# EAGLE board aw_301_runner (EAGLE 6.4)
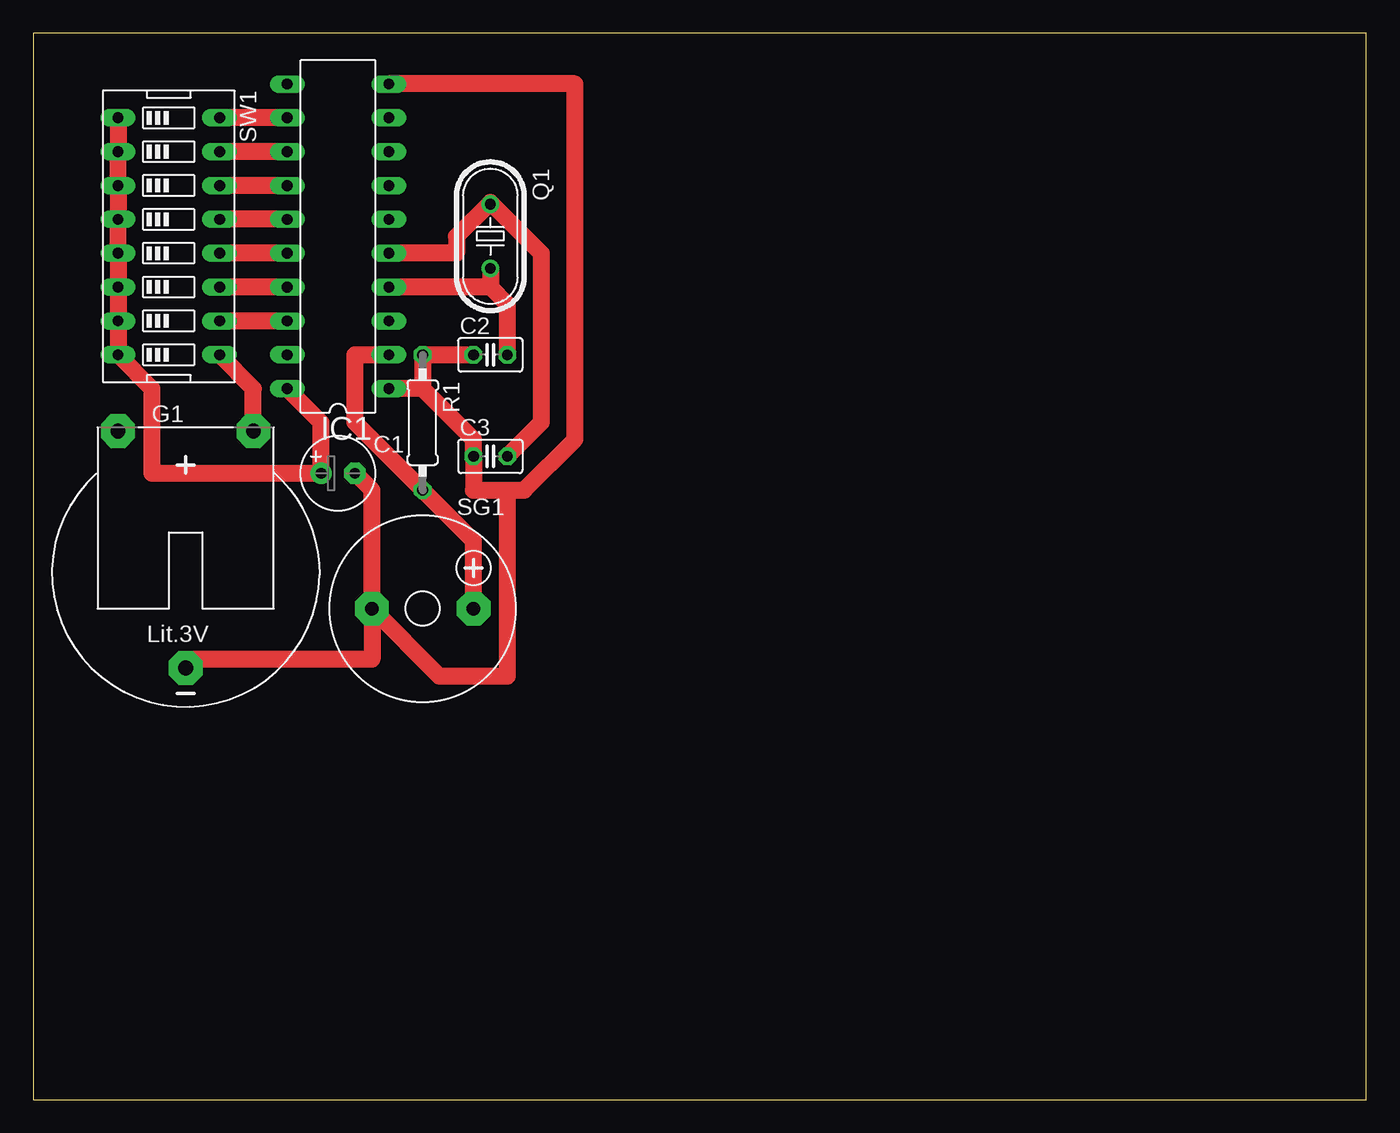
[diagram p0: board, top side]

Size 100 x 80 mm. Coordinates in mm from the lower left corner, seen from the top.
Outline: 0,0 100,0 100,80 0,80 0,0
Copper layers (1*16): Top 0.035mm / dielectric 1.5mm / Bottom 0.035mm
Design rules "default": minimum track width 10mil, minimum drill 24mil, track to track 8mil, track to pad 8mil, pad to pad 8mil, via to via 8mil, smd to smd 8mil, copper to edge 40mil, drill to drill 8mil, minimum pad ring 10mil, minimum via ring 8mil, stop-mask expansion 4mil, vias tented up to drill 0mil, thermal gap 10mil
Net classes: 0 default: width 1.27 mm, clearance 0.508 mm

## Footprints (pad centres in the part's own frame; a part is rotated, then mirrored left to right if it is on the bottom)
E2,5-6 = drill 0.813 pad 1.6: + -1.27,0 | drill 0.813 pad 1.6 octagon: - 1.27,0
C025-025X050 = drill 0.813 octagon: 1 -1.27,0; 2 1.27,0
CR2032H = drill 1.118 pad 2.54 octagon: + 5.08,10.795; +@1 -5.08,10.795; - 0,-6.985
DIL20 = drill 0.813 long: 1 -11.43,-3.81; 2 -8.89,-3.81; 3 -6.35,-3.81; 4 -3.81,-3.81; 5 -1.27,-3.81; 6 1.27,-3.81; 7 3.81,-3.81; 8 6.35,-3.81; 9 8.89,-3.81; 10 11.43,-3.81; 11 11.43,3.81; 12 8.89,3.81; 13 6.35,3.81; 14 3.81,3.81; 15 1.27,3.81; 16 -1.27,3.81; 17 -3.81,3.81; 18 -6.35,3.81; 19 -8.89,3.81; 20 -11.43,3.81
HC49U70 = drill 0.813: 1 -2.413,0; 2 2.413,0
0207/10 = drill 0.813 octagon: 1 -5.08,0; 2 5.08,0
F/CM12P = drill 1.016 pad 2.54 octagon: + 3.81,0; - -3.81,0
EDG-08 = drill 0.813 long: 1 -8.89,-3.81; 2 -6.35,-3.81; 3 -3.81,-3.81; 4 -1.27,-3.81; 5 1.27,-3.81; 6 3.81,-3.81; 7 6.35,-3.81; 8 8.89,-3.81; 9 8.89,3.81; 10 6.35,3.81; 11 3.81,3.81; 12 1.27,3.81; 13 -1.27,3.81; 14 -3.81,3.81; 15 -6.35,3.81; 16 -8.89,3.81

## Placement (x,y rotation side)
C1  100mF  [E2,5-6]  22.86,46.99 0 top
C2  22pF  [C025-025X050]  34.29,55.88 0 top
C3  22pF  [C025-025X050]  34.29,48.26 0 top
G1  CR2032H  [CR2032H]  11.43,39.37 0 top
IC1  AT90S2313P  [DIL20]  22.86,64.77 90 top
Q1  [HC49U70]  34.29,64.77 270 top
R1  1M  [0207/10]  29.21,50.8 270 top
SG1  F/CM12P  [F/CM12P]  29.21,36.83 0 top
SW1  [EDG-08]  10.16,64.77 270 top

## Library data of the parts
C1 = resistor
C2 C3 R1 = rcl
G1 = battery
IC1 = atmel; OC_FARNELL: unknown; OC_NEWARK: unknown
Q1 = crystal; OC_FARNELL: unknown; OC_NEWARK: unknown
SG1 = buzzer; OC_FARNELL: unknown; OC_NEWARK: unknown
SW1 = special

## Nets
N$1: G1.+ SW1.9
N$2: C2.2 IC1.4 Q1.2
N$3: C3.2 IC1.5 Q1.1
N$5: C1.+ IC1.20 SW1.1 SW1.2 SW1.3 SW1.4 SW1.5 SW1.6 SW1.7 SW1.8
N$6: IC1.2 R1.2 SG1.+
N$7: C1.- C2.1 C3.1 G1.- IC1.1 IC1.10 R1.1 SG1.-
N$8: IC1.12 SW1.16
N$9: IC1.13 SW1.15
N$10: IC1.14 SW1.14
N$11: IC1.15 SW1.13
N$12: IC1.16 SW1.12
N$13: IC1.17 SW1.11
N$14: IC1.18 SW1.10

## Tracks (layer width: path | path; a pad name or v marks a point on that pad's centre or on a via)
N$1
  Top 1.27: SW1.9 16.51,53.34 G1.+
N$2
  Top 1.27: 34.29,60.96 IC1.4 | Q1.2 34.29,60.96 | C2.2 35.56,59.69 34.29,60.96
N$3
  Top 1.27: C3.2 38.1,50.8 38.1,63.5 34.29,67.31 | IC1.5 31.75,63.5 31.75,64.77 34.29,67.31 | 34.29,67.31 Q1.1
N$5
  Top 1.27: IC1.20 21.59,50.8 C1.+ 8.89,46.99 8.89,53.34 SW1.8 SW1.7 SW1.6 SW1.5 SW1.4 SW1.3 SW1.2 SW1.1
N$6
  Top 1.27: SG1.+ 33.02,41.91 R1.2 24.13,50.8 24.13,55.88 IC1.2
N$7
  Top 1.27: C1.- 25.4,45.72 SG1.- | SG1.- 25.4,33.02 11.43,33.02 G1.- | 29.21,53.34 IC1.1 | 29.21,53.34 R1.1 C2.1 | IC1.10 40.64,76.2 40.64,49.53 36.83,45.72 35.56,45.72 | 35.56,45.72 33.02,45.72 C3.1 33.02,49.53 29.21,53.34 | SG1.- 30.48,31.75 35.56,31.75 35.56,45.72
N$8
  Top 1.27: IC1.12 SW1.16
N$9
  Top 1.27: IC1.13 SW1.15
N$10
  Top 1.27: IC1.14 SW1.14
N$11
  Top 1.27: IC1.15 SW1.13
N$12
  Top 1.27: IC1.16 SW1.12
N$13
  Top 1.27: IC1.17 SW1.11
N$14
  Top 1.27: IC1.18 SW1.10